# Altium PCB GEM_HV_channel.PcbDoc (part 3 of 3)
Units mm, origin at the board's own origin, x right, y up, seen from the top; angles counter-clockwise.
Board outline 124.5 x 38 mm, 4 copper layers (Top Layer, Layer 1, Layer 2, Bottom Layer), stack 1.441 mm thick; 166 components, 114 nets, 518 pads, 164 vias.
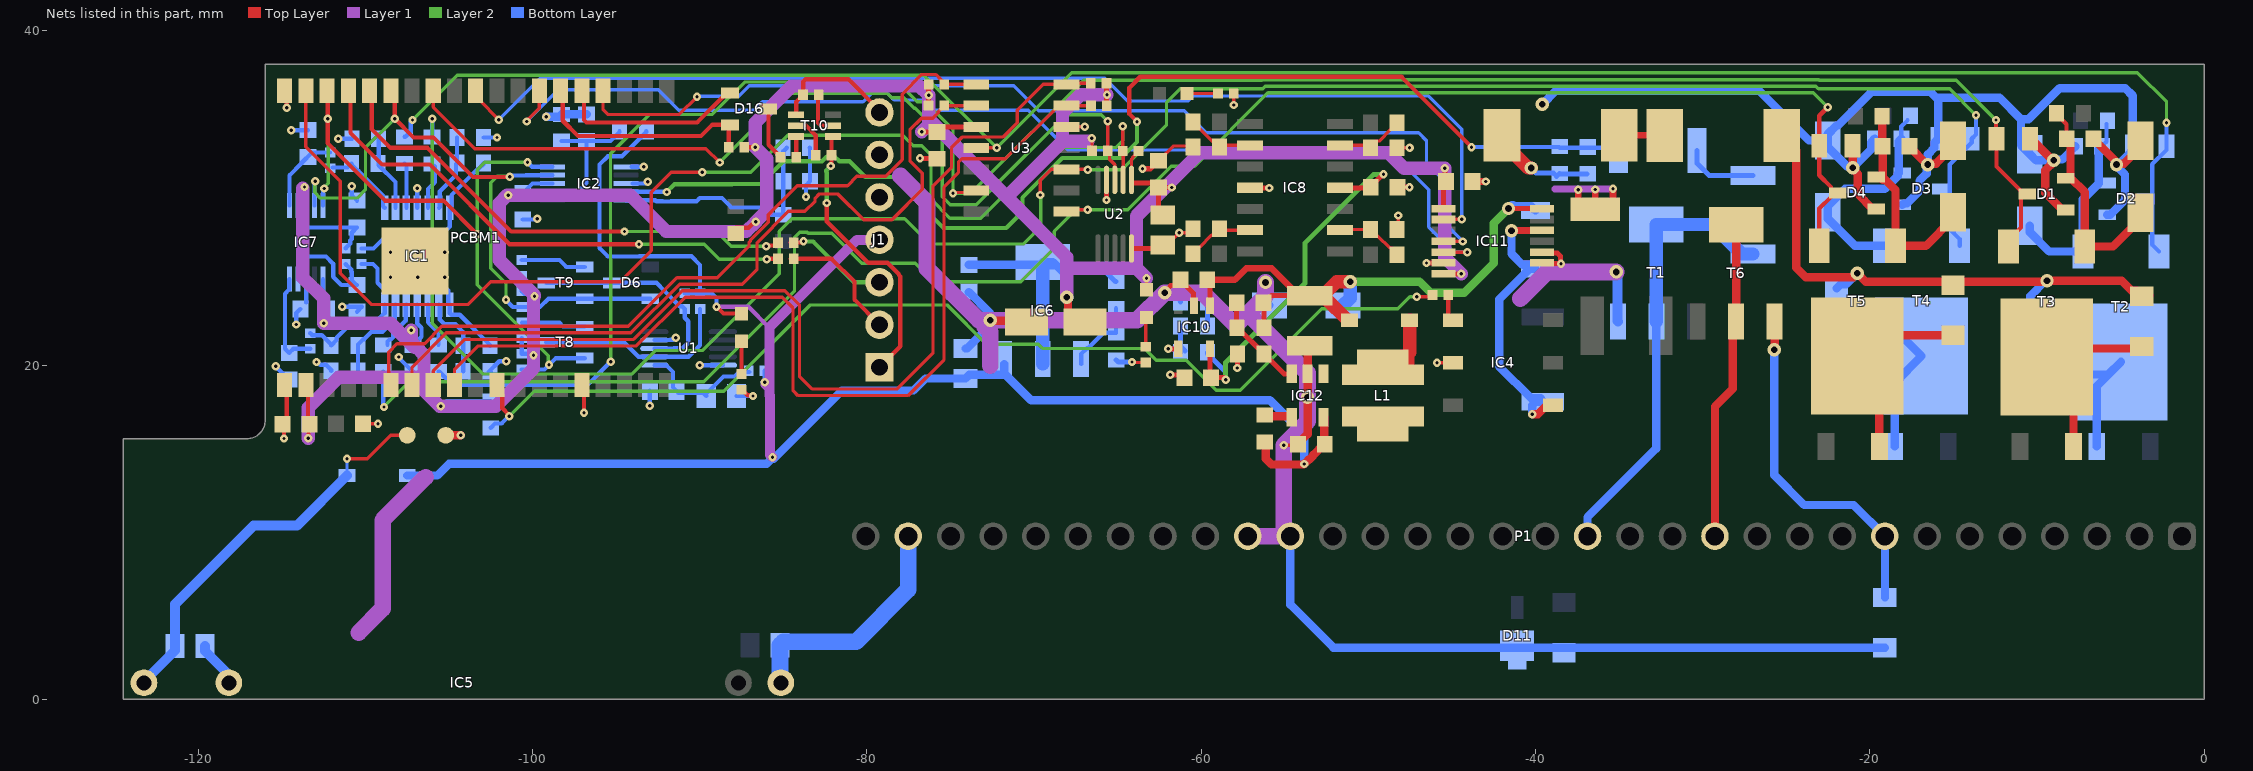
[diagram p4: the nets of this part, all layers, seen from the top]

## Via types
v1: diameter 0.5, hole 0.2, Top Layer to Bottom Layer, tented both sides, 139 vias
v2: diameter 0.8, hole 0.4, Top Layer to Bottom Layer, tented both sides, 19 vias
v3: diameter 0.5, hole 0.2, Top Layer to Bottom Layer, 6 vias

## Nets (pads, with @x,y where several pads share a name; then routed paths per layer and width w, separated by ;. In a path a pad name is that pad's centre, name@x,y a point inside that pad or via, vN(x,y) a via of type N, cw(c..) or ccw(c..) an arc to the next point about the centre after c; other vN are vias at no path point) (continued)
GND_HV: B3.1 C1.1 C2.1 C3.1 C4.1 C5.1 C7.1 C8.2 C9.1 C10.1 C11.1 C12.1 C13.1 C14.1 C16.1 C17.1 C18.1 C19.1 C20.1 C21.1 C22.1 C23.1 C24.1 C26.1 C27.1 C28.1 C29.1 C30.1 C39.1 C42.1 C48.1 C49.1 D1.1 D2.1 D3.1 D4.1 D5.2 D9.2 D10.2 D11.2 D12.2 D13.2 D14.2 D15.2 D26.2 IC1.11 IC2.1 IC2.3 IC4.2 IC5.14 IC7.3 IC8.11 IC10.2 IC11.6 IC11.9 IC11.10 IC12.2 J1.6 P1.22 P1.23 PCBM1.1 PCBM1.15 PCBM1.38 PCBM1.39 R2.1 R7.1 R8.1 R10.1 R14.1 R17.1 R18.1 R19.1 R20.1 R23.1 R24.1 R28.1 R31.1 R43.1 R44.1 R50.1 R52.1 R55.2 R60.1 R62.1 R66.1 T1.3 TP1.1 U1.4 U1.10 U2.4 U2.10 U3.12 | length 291.6
  Top Layer w0.2: C24.1@-110.157,16.5 v1(-109.25,16.5) ; U3.12@-68.06,34.259 v1(-66.962,34.259) ; v1(-64.145,20.188) -64.114,20.158 R44.1@-63.312,20.158 ; C21.1@-62.558,32.226 -61.677,33.107 -60.56,33.107 R52.1@-60.505,33.052 ; C22.1@-62.309,27.182 -62.059,27.182 v1(-61.323,27.919) -60.743,27.919 R60.1@-60.495,28.166 ; v1(-58.06,35.56) R55.2@-58.06,36.25 ; v1(-55.063,15.215) -54.273,15.215 C27.1@-54.212,15.276 ; R2.1@-48.301,28.148 -48.206,28.243 v1(-48.206,28.953) ; R14.1@-48.258,33.005 v1(-47.537,33.005) ; v1(-45.895,20.139) -44.486,20.139 IC4.2@-44.473,20.127
  Top Layer w0.254: v1(-114.87,15.612) -114.87,16.302 -114.709,16.463 PCBM1.1@-114.709,18.318 ; v1(-114.709,35.392) PCBM1.38@-114.709,36.418 ; v1(-96.929,17.147) PCBM1.15@-96.929,18.318 ; R43.1@-87.5,18.53 -87.48,18.53 -87.151,18.201 -86.859,18.201 v1(-86.812,18.154)
  Top Layer w0.3: v1(-76.821,32.387) -76.783,32.35 C23.1@-75.742,32.35 ; U2.4@-65.672,31.183 -65.664,31.175 v1(-65.664,29.88) ; U2.10@-64.172,26.983 -62.509,26.983 C22.1@-62.309,27.182 ; v1(-63.514,31.751) -63.033,31.751 C21.1@-62.558,32.226 ; v2(-62.192,24.331) -62.192,24.392 -61.824,24.76 -61.565,24.76 C20.1@-61.24,25.085 ; v1@-61.838,19.402 -61.163,19.402 C19.1@-61.011,19.251 ; C20.1@-61.24,25.11 C20.1@-61.24,25.085 ; IC10.2@-60.431,23.565 -60.467,23.601 -60.467,24.311 C20.1@-61.24,25.085 ; v1(-57.84,19.83) R66.1@-57.84,20.674 ; IC8.11@-57.062,30.588 v1@-55.952,30.588 ; C29.1@-48.261,30.65 v1(-47.54,30.65) ; v1@-46.525,26.112 v1(-46.523,26.115) IC11.6@-45.515,26.115 ; IC11.9@-39.615,26.115 -39.597,26.096 -38.496,26.096 -38.515,26.115 -38.515,26.527 -38.691,26.703 -39.554,26.703 IC11.10@-39.615,26.765
  Top Layer w0.4: C26.1@-43.768,30.984 v1(-42.977,30.984) ; TP1.1@-37.451,29.302 v1(-37.451,30.487) ; TP1.1@-36.432,29.323 v1(-36.432,30.507) ; TP1.1@-35.365,29.36 v1(-35.365,30.544)
  Top Layer w0.5: B3.1@-105.2,15.8 v1(-104.3,15.8) ; v2@-72.6,22.667 -70.546,22.667 C8.2@-70.457,22.578 ; IC8.11@-57.088,30.613 IC8.11@-57.062,30.588 ; C27.1@-54.212,15.276 -54.212,15.301 -53.637,15.877 IC12.2@-53.637,19.478 -53.637,21.028 C28.1@-53.508,21.156 ; R10.1@-21.03,33.138 -21.023,33.13 -21.023,31.82 v2(-21.016,31.813) -21.016,31.732 -20.724,31.44 -20.724,30.244 -19.831,29.351 D4.1@-19.631,29.351 ; C4.1@-17.638,33.092 -17.638,33.067 -16.571,32 v2(-16.546,32) -16.489,32.057 -16.036,32.057 -15.03,33.063 D15.2@-15.03,33.438 ; R8.1@-10.424,33.547 -10.362,33.547 v2@-9.223,32.408 ; v2(-9,32.25) -9,32.169 -9.5,31.669 -9.5,30.296 -8.484,29.281 D1.1@-8.284,29.281 ; C2.1@-6.624,33.547 -6.624,33.522 -5.307,32.206 -5.307,32.057 v2(-5.25,32) -5.193,32.057 -4.795,32.057 -3.812,33.04 D13.2@-3.812,33.415
  Top Layer w0.8: D26.2@-42,33.75 -42,33.353 -40.442,31.795 v2(-40.266,31.795)
  Layer 1 w0.4: -38.844,30.544 -36.432,30.544 v1(-35.365,30.544) v1@-35.41,30.5
  Layer 1 w1: -110.4,4 -108.97,5.43 -108.97,10.73 -106.4,13.3 ; -77.985,31.315 -76.4,29.73 -76.4,25.779 -73.311,22.689 -63.834,22.689 v2(-62.192,24.331) -59.902,24.331 -57.935,22.365 -57.2,23.1 ; -72.965,22.344 -72.621,22 -72.621,19.979 ; P1.23@-57.21,9.77 P1.22@-54.67,9.77 -55.063,10.163 v1(-55.063,15.215) -53.642,16.637 v2(-53.642,18.071) -53.642,19.542 -57.2,23.1 ; v2(-56.155,24.951) -56.155,24.145 -57.2,23.1 ; -40.91,23.99 -39.322,25.578 v2(-35.174,25.578)
  Bottom Layer w0.254: v1@-115.354,19.941 v1(-115.361,19.934) -115.361,19.906 -114.588,19.133 C11.1@-114.563,19.133 ; v1(-114.442,34.058) C12.1@-113.438,34.058 ; v1(-114.143,22.435) -114.143,23.119 C42.1@-113.896,23.366 ; C42.1@-113.54,23.747 IC7.3@-113.54,25.145 ; v1(-112.928,20.191) -112.861,20.191 -112.701,20.031 -112.371,20.031 -112.048,19.708 R18.1@-112.048,19.658 ; v1(-111.626,33.552) -110.824,33.552 R19.1@-110.811,33.538 ; v1(-111.381,23.5) -110.2,23.5 C10.1@-110.5,23.2 ; v1(-110.825,30.7) -110.825,30.167 C13.1@-110.5,29.842 ; v1(-108.016,20.489) -108,20.474 -108,20.436 -107.18,19.617 C16.1@-107.155,19.617 ; IC1.11@-106.901,29.413 v1(-106.901,30.577) ; R20.1@-102.924,33.625 -102.921,33.621 v1(-102.128,33.621) ; R17.1@-102.554,19.64 -102.502,19.588 -102.641,19.588 -101.994,20.235 v1(-101.581,20.235) ; C48.1@-100.587,28.71 -99.789,28.71 v1(-99.731,28.768) ; IC2.1@-94.065,31.864 v1(-93.352,31.864) v1@-93.4,31.816 ; IC2.3@-94.015,30.868 -93.279,30.868 -93.17,30.977 v1(-93.103,30.977) ; v1(-93,17.567) -92.989,17.578 C3.1@-92.989,18.485 ; U1.4@-92.715,21.5 -92.707,21.508 -91.756,21.508 -91.748,21.516 -91.566,21.516 v1(-91.443,21.639) ; v1(-90,20) U1.10@-88.615,20 ; C7.1@-87.807,18.154 v1(-86.812,18.154) ; v1@-83.642,30.081 -83.641,30.759 C14.1@-83.4,31 ; R50.1@-83.425,33 -83.399,32.974 C14.1@-83.399,31.001
  Bottom Layer w0.3: R24.1@-65.093,20.322 -64.96,20.188 v1(-64.145,20.188) ; v2(-62.192,24.331) -62.18,24.344 -61.755,24.344 -61.231,23.82 R62.1@-61.231,23.77 ; v2(-40.266,31.795) -39.971,31.5 -38.935,31.5 -38.735,31.3 R23.1@-38.56,31.475 -38.535,31.45 C18.1@-36.91,31.45
  Bottom Layer w0.5: v1(-99.188,34.855) -99.185,34.852 -98.421,34.852 R31.1@-98.27,35.004 C17.1@-96.77,35.004 ; C30.1@-74.1,21 -74.006,21 -72.621,22.385 v2(-72.621,22.688) -72.621,23.089 C9.1@-73.9,24.367 ; v2(-56.155,24.951) -56.155,23.67 -56.064,23.578 D9.2@-55.922,23.578 ; P1.22@-54.67,9.77 -54.67,5.67 -52.1,3.1 D10.2@-19.1,3.1 ; v2(-39.6,35.6) -38.8,36.4 -26.6,36.4 -23.639,33.439 D14.2@-22.522,33.439 ; v2@-21.328,31.871 -22.522,33.064 D14.2@-22.522,33.439 ; v2(-21.016,31.813) -19.934,32.895 -19.934,33.322 C5.1@-19.709,33.547 ; D3.1@-18.059,29.597 -17.984,29.672 -17.781,29.672 -17.029,30.424 -17.029,31.035 -16.604,31.461 -16.604,31.943 v2(-16.546,32) -16.535,32.011 -16.535,32.615 -16.134,33.017 -16.134,33.322 R28.1@-15.909,33.547 -15.909,35.841 -15.756,35.994 ; C1.1@-7.721,33.102 -7.721,33.077 -8.49,32.307 -8.943,32.307 v2(-9,32.25) -10.055,32.25 D12.2@-10.436,32.631 -10.961,33.156 -10.961,34.711 ; D2.1@-5.812,29.001 -5.612,29.001 -4.736,29.877 -4.736,31.404 -5.25,31.919 v2(-5.25,32) -5.132,32 -4.255,32.877 R7.1@-4.255,33.102 ; R7.1@-4.277,33.123 -4.277,36.119 -4.733,36.576 -8.643,36.576 -10.507,34.711 -10.961,34.711 ; D14.2@-22.522,33.439 -22.522,33.814 -21.997,34.339 -21.912,34.339 -19.897,36.355 -16.378,36.355 -16.017,35.994 -15.756,35.994 ; -15.756,35.994 -15.75,36 -12.25,36 -10.961,34.711
  Bottom Layer w0.6: C49.1@-119.6,3.2 -119.6,2.899 -118.17,1.469 IC5.14@-118.17,1 ; v2(-35.174,25.578) -35.103,25.507 -35.103,22.644 T1.3@-35.073,22.614
  other v1: -61.856,19.421 -38.477,26.077 -83.646,30.081 -55.937,30.599
  other v3: -108.5,25.25 -106.875,25.25 -105.25,25.25 -108.5,26.75 -106.875,26.75 -105.25,26.75
GPIO0/EMAC_CLKIN: D16.2 PCBM1.25 R30.1 | length 13.3
  Top Layer w0.254: PCBM1.25@-98.199,35.918 -98.199,34.625 -97.289,33.715 -89.923,33.715 -89.26,34.378 D16.2@-88.19,34.378 -88.272,34.296 R30.1@-88.272,33.042
GPIO2/HS2_DATA0: D16.1 PCBM1.24 | length 11.3
  Top Layer w0.254: PCBM1.24@-96.929,36.418 -96.929,34.66 -96.78,34.511 -90.157,34.511 -88.39,36.278 D16.1@-88.19,36.278
HV_LIM: D20.1 D21.1 D22.1 D23.1 D24.1 | length 33.4
  Top Layer w0.5: D24.1@-25.269,33.737 -24.398,32.866 -24.398,25.82 -23.846,25.268 -20.982,25.268 v2(-20.75,25.5) -20.25,25 -14.593,25 -9.458,25 v2(-9.404,25.054) -4.939,25.054 -4.332,24.447 -4.07,24.447 D21.1@-3.745,24.122 ; D21.1@-3.358,24.211 D21.1@-3.295,24.148
  Bottom Layer w0.5: D22.1@-21.993,24.598 -21.765,24.825 -21.425,24.825 v2(-20.75,25.5) ; -10.405,23.738 -10.405,24.138 -9.489,25.054 v2(-9.404,25.054)
HV_Meas: C18.2 IC2.4 R22.2 R23.2 | length 71.1
  Top Layer w0.254: v1(-63.843,34.568) -64.3,35.025 -64.3,36.6 -63.65,37.25 -48,37.25 -48,37.21 v1(-43.834,33.044)
  Layer 2 w0.254: v1(-91.983,30.363) -91.519,30.827 -88.06,30.827 -88.053,30.834 -86.366,30.834 -85,32.2 -82.684,32.2 -82.402,32.483 -81.932,32.483 -81.649,32.2 -81.05,32.2 -80.1,31.25 -77.75,31.25 -77,30.5 -77,29.791 -75.414,28.205 -71.666,28.205 -70.692,29.179 -70.692,30.02 -68.312,32.4 -64.8,32.4 -63.843,33.357 v1(-63.843,34.568)
  Bottom Layer w0.254: IC2.4@-94.408,30.368 -91.988,30.368 v1(-91.983,30.363) ; v1(-43.834,33.044) -38.604,33.044 -38.56,33 -35.194,33 R22.2@-35.037,32.844
HVQN_C: P1.15 R21.1 T1.2 T1.4 | length 26.8
  Bottom Layer w0.5: P1.15@-36.89,9.77 -36.89,10.91 -32.79,15.01 T1.2@-32.79,22.597
  Bottom Layer w0.8: T1.2@-32.773,22.614 T1.4@-32.773,28.414 -29.427,28.414 -27.663,26.65 R21.1@-27,26.65
HVQP_C: P1.12 T6.2 T6.4 | length 19.2
  Top Layer w0.5: P1.12@-29.27,9.77 -29.27,17.53 -28.2,18.6 -28.2,22.4 T6.2@-28,22.6 T6.4@-28,28.4
HVQP_E: D10.1 P1.8 T6.3 | length 21.1
  Top Layer w0.5: T6.3@-25.85,22.45 T6.3@-25.7,22.6 v2@-25.7,21
  Bottom Layer w0.5: v2(-25.716,20.922) -25.716,13.416 -23.936,11.636 -20.976,11.636 P1.8@-19.11,9.77 -19.1,9.76 D10.1@-19.1,6.1
HVSET0: PCBM1.11 R27.2 R68.1 | length 65.5
  Top Layer w0.2: v1(-47.1,24.1) -46.27,24.1 R68.1@-46.17,24.2
  Top Layer w0.254: PCBM1.11@-102.009,18.318 -101.909,18.318 -101.811,18.22 -101.811,17.423 -101.407,17.018 v1(-101.407,16.952)
  Layer 2 w0.2: v1(-101.407,16.952) -99.911,18.447 -88.553,18.447 -83.4,23.6 -75.2,23.6 -72.85,21.25 -69.75,21.25 -69.5,21 -63.4,21 -62.701,20.301 -60.901,20.301 -59.1,18.5 -57.67,18.5 -52.791,23.379 -48.236,23.379 -47.515,24.1 v1(-47.1,24.1)
  Bottom Layer w0.254: R27.2@-102.5,16.25 -102.243,16.507 -101.851,16.507 v1(-101.407,16.952)
I2C1_SCL: IC2.10 IC7.10 PCBM1.36 R12.1 T8.2 | length 41.5
  Top Layer w0.254: PCBM1.36@-112.169,35.918 -112.25,35.837 v1(-112.25,34.75) -112.25,33.269 -108.824,29.843 -105.333,29.843 v1(-103.32,27.829)
  Layer 2 w0.2: v1(-112.464,30.566) -112.464,30.633 -112.216,30.88 -112.216,34.716 v1(-112.25,34.75) ; v1(-100.303,32.137) -102.863,32.137 -103.32,31.68 v1(-103.32,27.829) -103.32,24.82 -99.062,20.562 -99.062,20.062 v1(-99.015,20.015)
  Bottom Layer w0.254: IC7.10@-112.54,29.545 -112.54,30.489 v1(-112.464,30.566) ; R12.1@-100.665,19.738 R12.1@-100.645,19.738 -99.293,19.738 v1(-99.015,20.015) -98.61,20.42 T8.2@-96.887,20.42 ; v1(-100.303,32.137) -100.033,31.868 IC2.10@-98.808,31.868
I2C1_SDA: D6.2 IC2.9 IC7.9 PCBM1.33 R13.1 T9.2 | length 40.4
  Top Layer w0.254: PCBM1.33@-108.359,35.918 -108.25,35.809 v1(-108.25,34.75) -107.122,33.622 -105.935,33.622 -103.57,31.257 -101.369,31.257 v1(-101.361,31.265)
  Layer 2 w0.2: v1(-113,31) -113.031,30.969 -113.031,30.331 -112.698,29.999 -110.501,29.999 -110,30.5 -110,33 v1(-108.25,34.75) ; v1(-101.592,23.908) -101.592,24.898 -102.5,25.806 -102.5,30.909 -102.112,31.297 -101.393,31.297 v1(-101.361,31.265)
  Bottom Layer w0.254: IC7.9@-113.04,29.545 -113.04,30.96 v1(-113,31) ; v1@-101.628,23.926 -101.187,23.485 -100.651,23.485 R13.1@-100.645,23.479 -99.551,23.479 -99.054,23.976 T9.2@-96.887,23.976 D6.2@-92.954,23.976 ; v1(-101.361,31.265) -101.283,31.344 -100.421,31.344 -100.396,31.368 IC2.9@-98.808,31.368
I2C2_SCL: PCBM1.37 R53.1 U2.2 | length 75.1
  Top Layer w0.2: PCBM1.37@-113.564,36.418 -113.564,33.064 -111.5,31 -111.5,25.5 -109.626,23.626 -103.874,23.626 -102.5,25 -94.753,25 -92.895,26.859 -92.895,30.355 -91.7,31.55 v1(-89.847,31.55) ; v1(-64.7,34.3) -64.7,32.839 -64.672,32.811 U2.2@-64.672,31.183
  Layer 2 w0.2: v1(-89.847,31.55) -86.95,31.55 -84.75,33.75 -77.853,33.75 -77.22,33.117 -76.722,33.117 -76.165,32.56 -76.165,29.915 -75.034,28.784 -73.195,28.784 -68.961,33.018 -65.107,33.018 -64.7,33.425 v1(-64.7,34.3)
I2C2_SDA: PCBM1.31 R54.1 U2.3 | length 55.3
  Top Layer w0.2: PCBM1.31@-105.944,36.418 -105.944,35.444 -103.453,32.953 -89.637,32.953 v1(-88.811,32.127) ; v1(-65.6,34.6) -65.597,34.597 R54.1@-65.597,32.826 -65.488,32.717 -65.488,32.321 -65.172,32.005 U2.3@-65.172,31.183
  Layer 2 w0.2: v1(-88.811,32.127) -84.689,36.25 -79.732,36.25 -79.722,36.26 -78.778,36.26 -78.518,36 -77.802,36 -77.162,35.36 -77.11,35.36 -75.486,33.736 -75.486,30.071 -75.009,29.595 -73.461,29.595 -72.292,30.764 -72.292,30.779 -68.085,34.985 -65.985,34.985 v1(-65.6,34.6)
I_Meas0: IC1.8 R47.1 R92.2 | length 4.7
  Bottom Layer w0.254: R47.1@-111.962,31.829 -111.068,31.829 R92.2@-110.835,32.061 ; R92.2@-110.811,32.014 -110.811,31.964 -110.488,31.641 -110.438,31.641 -108.949,30.153 -108.949,29.511 IC1.8@-108.851,29.413
I_Meas1: IC1.1 R16.2 R45.1 | length 11
  Bottom Layer w0.254: R45.1@-110.24,26.052 -109.552,26.052 -109.276,25.776 -109.276,24.931 -109.01,24.665 ; -109,24.655 -109.01,24.665 ; R16.2@-102.554,21.164 -102.554,21.214 -104.354,23.015 -104.853,23.015 -104.951,23.113 IC1.1@-104.951,23.613 -105.049,23.711 -105.049,24.473 -105.241,24.665 -109.01,24.665
I_Meas2: IC1.14 R48.1 R93.2 | length 10.5
  Bottom Layer w0.254: R48.1@-110.242,26.985 -109.515,26.985 -108.5,28 -105.25,28 -104.951,28.299 IC1.14@-104.951,29.413 -104.853,29.511 -104.853,30.171 -103.297,31.728 -103.247,31.728 -102.924,32.051 R93.2@-102.924,32.101
I_Meas3: IC1.7 R46.1 R91.2 | length 6.2
  Bottom Layer w0.254: R46.1@-113.302,21.916 -113.181,21.795 -112.611,21.795 -112.048,21.232 R91.2@-112.048,21.182 -111.725,21.505 -111.725,21.641 -111.081,22.285 -109.973,22.285 -109.758,22.5 -109.464,22.5 -108.851,23.113 IC1.7@-108.851,23.613
I_Meas_sens0: D2.3 R7.2 R109.1 T2.2 U3.4 | length 122.4
  Top Layer w0.2: U3.4@-73.46,32.989 -73.449,33 v1(-72.239,33)
  Layer 2 w0.2: v1(-107.182,34.669) -104.502,37.349 -76.588,37.349 v1(-72.239,33) -67.739,37.5 -62.621,37.5 -4,37.5 -2.255,35.755 v1(-2.255,34.495)
  Bottom Layer w0.254: R109.1@-107.663,33.663 -107.613,33.663 -107.29,33.986 -107.29,34.561 v1(-107.182,34.669) ; T2.2@-2.7,26.797 -3.115,27.211 -3.115,32.017 -2.255,32.877 R7.2@-2.255,33.102 v1(-2.255,34.495)
I_Meas_sens1: D1.3 R8.2 R107.1 T3.2 U3.6 | length 127.4
  Top Layer w0.2: v1(-74.854,30.288) -74.817,30.325 -73.584,30.325 U3.6@-73.46,30.449
  Top Layer w0.254: v1(-12.455,34.665) -12.455,33.579 R8.2@-12.424,33.547 -12.424,31.886 -10.982,30.444 -10.982,30.429 D1.3@-10.784,30.231 ; T3.2@-11.704,27.097 -11.704,27.497 -10.967,28.234 -10.967,30.048 D1.3@-10.784,30.231 ; D1.3@-10.584,30.231 D1.3@-10.784,30.231
  Layer 2 w0.2: v1(-95.331,20.201) -95.331,26.306 -95.34,26.315 -95.34,32.66 -93,35 -89.25,35 -87.312,36.938 -78.188,36.938 -77,35.75 -76.667,35.75 -76.53,35.613 -76.363,35.613 -74.854,34.104 v1(-74.854,30.288) -73.79,30.288 -67.039,37.04 -56.363,37.04 -56.333,37.07 -55.32,37.07 -23.065,37.07 -23.035,37.04 -14.831,37.04 v1(-12.455,34.665)
  Bottom Layer w0.254: R107.1@-105.631,19.617 -105.581,19.617 -104.777,18.813 -96.719,18.813 v1(-95.331,20.201)
I_Meas_sens2: D3.3 R28.2 R110.1 T4.2 U3.10 | length 128.7
  Top Layer w0.2: v1(-69.625,30.182) -69.625,31.075 -68.981,31.719 U3.10@-68.06,31.719 -66.815,31.719 v1(-66.789,31.694)
  Layer 2 w0.2: v1(-106.008,34.736) -106.008,22.5 -102.984,19.475 -94.025,19.475 -92.619,20.881 -89.829,20.881 -85.25,25.46 -85.25,28 -84.5,28.75 -77.75,28.75 -76.25,27.25 -70.629,27.25 -69.6,28.279 -69.6,30.157 v1(-69.625,30.182) ; v1(-66.789,31.694) -64.749,31.694 -62.074,34.369 -62.074,35.726 -61.27,36.53 -56.322,36.53 -56.172,36.68 -55.159,36.68 -23.227,36.68 -23.077,36.53 -15.232,36.53 v1(-13.653,34.951)
  Bottom Layer w0.254: R110.1@-106.014,33.644 -106.008,33.65 v1(-106.008,34.736) ; T4.2@-14.629,27.147 -14.629,27.547 -15.221,28.139 -15.221,32.01 -13.909,33.322 R28.2@-13.909,33.547 -13.653,33.803 v1(-13.653,34.951)
I_Meas_sens3: D4.3 R10.2 R108.1 T5.2 U3.8 | length 112.3
  Top Layer w0.2: U3.8@-68.06,29.179 -67.939,29.3 v1(-66.8,29.3)
  Top Layer w0.254: T5.2@-23.03,27.138 -23.03,29.369 -22.329,30.071 -22.329,30.103 D4.3@-22.131,30.301 ; v1(-22.524,35.426) -23.03,34.92 R10.2@-23.03,33.138 -23.03,31.364 -22.329,30.662 -22.329,30.499 D4.3@-22.131,30.301 ; D4.3@-21.931,30.301 D4.3@-22.131,30.301
  Layer 2 w0.2: v1(-108.893,17.499) -107.392,19 -89.767,19 -84.334,24.432 -84.334,27.627 -84.018,27.944 -83.571,27.944 -83.527,27.9 -82.1,27.9 -80.3,26.1 -77.1,26.1 -76,25 -70.8,25 -68.8,27 -68.8,28 -67.5,29.3 v1(-66.8,29.3) -64.4,29.3 -61.8,31.9 -60.4,31.9 -56.01,36.29 -54.997,36.29 -23.389,36.29 v1(-22.524,35.426)
  Bottom Layer w0.254: R108.1@-108.929,19.617 -108.929,17.535 v1(-108.893,17.499)
NetB2_1: B2.1 C49.2 D17.2 IC5.16 | length 24.1
  Top Layer w0.2: v1(-111.1,14.4) -109.9,14.4 -108.5,15.8 B2.1@-107.5,15.8
  Bottom Layer w0.2: D17.2@-111.1,13.4 v1(-111.1,14.4)
  Bottom Layer w0.6: IC5.16@-123.25,1 -123.25,1.074 -121.4,2.924 C49.2@-121.4,3.2 -121.4,5.7 -116.7,10.4 -114.1,10.4 D17.2@-111.1,13.4
NetC1_2: C1.2 D2.2 D12.1 R15.1 T2.1 | length 12.2
  Bottom Layer w0.254: C1.2@-6.121,33.102 -5.852,33.37 R15.1@-5.852,34.422
  Bottom Layer w0.5: D12.1@-10.436,28.331 -10.436,27.956 -9.277,26.797 T2.1@-7.26,26.797 -7.26,29.919 -6.308,30.871 -6.308,32.914 C1.2@-6.121,33.102
NetC2_2: C2.2 D1.2 D13.1 R9.1 T3.1 | length 12.8
  Top Layer w0.254: R9.1@-8.7,34.872 -8.242,34.414 -8.242,33.565 C2.2@-8.224,33.547
  Top Layer w0.5: C2.2@-8.224,33.547 -7.999,33.322 -7.999,31.206 -7.144,30.351 T3.1@-7.144,27.097 -5.455,27.097 -3.812,28.74 D13.1@-3.812,29.115
NetC3_2: C3.2 C7.2 R73.2 U1.1 | length 7.5
  Bottom Layer w0.254: U1.1@-92.715,20 -92.015,20 -91.603,19.588 -91.603,18.674 -91.281,18.353 -89.806,18.353 -89.682,18.229 C7.2@-89.607,18.154 ; C7.2@-89.607,18.304 -88.587,19.324 -87.916,19.324 -87.647,19.593 R73.2@-87.034,19.593
NetC4_2: C4.2 D4.2 D15.1 R11.1 T5.1 | length 12.9
  Top Layer w0.5: D4.2@-19.631,31.251 -19.233,31.251 -18.47,30.489 T5.1@-18.47,27.138 -16.655,27.138 -15.03,28.763 D15.1@-15.03,29.138 ; R11.1@-19.25,34.673 -19.25,33.104 C4.2@-19.238,33.092 D4.2@-19.238,31.097
NetC5_2: C5.2 D3.2 D14.1 R29.1 T4.1 | length 13.3
  Bottom Layer w0.254: C5.2@-18.109,33.547 -18.122,33.56 -18.122,34.28 R29.1@-17.757,34.645
  Bottom Layer w0.5: T4.1@-19.189,27.147 -20.905,27.147 -22.522,28.764 D14.1@-22.522,29.139 -22.522,29.514 -21.49,30.547 -19.104,30.547 -18.334,31.316 -18.334,31.441 -18.279,31.497 -18.279,33.377 C5.2@-18.109,33.547
NetC10_2: C10.2 IC7.4 R45.2 | length 7.3
  Bottom Layer w0.254: IC7.4@-114.04,25.145 -114.017,25.168 -114.017,26.017 -113.534,26.5 -112.365,26.5 -111.926,26.061 -111.926,25.282 -111.444,24.8 C10.2@-110.525,24.8 ; R45.2@-111.18,26.052 -111.18,26.032 -111.017,25.869 -110.997,25.869 -110.847,25.719 -110.847,25.611 -110.825,25.588 -110.825,25.1 C10.2@-110.525,24.8 ; C10.2@-110.5,24.8 C10.2@-110.525,24.8
NetC11_2: C11.2 IC7.5 R46.2 | length 6
  Bottom Layer w0.254: IC7.5@-114.54,25.145 -114.563,25.122 -114.563,24.522 -114.816,24.27 -114.816,20.985 C11.2@-114.563,20.733 -114.32,20.976 R46.2@-113.302,20.976
NetC12_2: C12.2 IC7.6 R47.2 | length 4.8
  Bottom Layer w0.254: IC7.6@-114.54,29.545 -114.54,31.356 -113.811,32.085 -113.811,32.11 -113.2,32.721 R47.2@-112.13,32.721
NetC13_2: C13.2 IC7.7 R48.2 | length 6.2
  Bottom Layer w0.254: IC7.7@-114.04,29.545 -114.04,28.54 -113.742,28.242 -110.525,28.242 C13.2@-110.5,28.242 -110.817,27.925 -110.817,27.554 -110.908,27.463 -110.908,27.28 -111.182,27.005 R48.2@-111.182,26.985
NetC14_2: C14.2 IC2.5 R49.2 R50.2 | length 14
  Bottom Layer w0.254: IC2.5@-94.408,29.868 -92.67,29.868 -92.603,29.801 -92.223,29.801 -92.218,29.796 -91.748,29.796 -91.743,29.801 -90.199,29.801 -90,30 -88.676,30 -88.109,29.433 -86.314,29.433 -85.881,29 R49.2@-85,29 C14.2@-85,31 -85,32.8 R50.2@-84.8,33
NetC17_2: C17.2 IC2.7 R31.2 R32.2 | length 8.5
  Bottom Layer w0.254: IC2.7@-98.808,30.368 -97.303,30.368 -96.77,30.901 C17.2@-96.77,33.404 ; R31.2@-98.27,33.404 C17.2@-96.77,33.404 ; R32.2@-94.8,34 -94.8,33.95 -95.346,33.404 C17.2@-96.77,33.404
NetC25_1: C25.1 IC12.3 R64.1 R66.2 | length 6
  Top Layer w0.3: C25.1@-57.879,23.737 -57.879,22.262 R64.1@-57.854,22.237 -57.854,22.187 -57.554,21.887 -57.471,21.887 -56.608,21.024 -56.54,21.024 -56.24,20.724 R66.2@-56.24,20.674 -55.045,19.478 IC12.3@-54.587,19.478
NetD8_2: D8.2 IC12.1 L1.2 | length 4.4
  Top Layer w0.8: L1.2@-49.137,20.478 L1.2@-47.987,20.528 ; L1.2@-47.855,20.459 -47.537,20.778 D8.2@-47.537,22.678 ; L1.2@-47.645,19.498 -47.645,20.404 L1.2@-47.629,20.404
NetD16_3: D16.3 R38.2 | length 3.2
  Top Layer w0.254: D16.3@-85.89,35.328 -85.89,33.186 -85.172,32.468 R38.2@-85.172,32.448
NetD20_2: D20.2 R101.1 T2.3 | length 10.3
  Bottom Layer w0.5: -10.405,19.438 T2.3@-5.739,19.438 ; R101.1@-6.425,15.138 -6.425,18.752 T2.3@-5.739,19.438 ; T2.3@-4.98,20.197 T2.3@-5.739,19.438
NetD21_2: D21.2 R102.1 T3.3 | length 12.2
  Top Layer w0.5: R102.1@-7.824,15.138 -7.824,18.897 -9.399,20.472 T3.3@-9.424,20.497 -8.921,21 D21.2@-3.495,21
NetD22_2: D22.2 R103.1 T4.3 | length 11.8
  Bottom Layer w0.5: D22.2@-22.244,21.546 -17.908,21.546 T4.3@-16.909,20.547 -18.509,18.947 R103.1@-18.509,15.138
NetD23_2: D23.2 R104.1 T5.3 | length 12.2
  Top Layer w0.5: R104.1@-19.43,15.138 -19.43,19.218 T5.3@-20.75,20.538 -19.492,21.796 D23.2@-15.038,21.796
NetD24_2: D24.2 D26.1 | length 2.7
  Top Layer w0.254: D24.2@-32.282,33.75 D24.2@-32.269,33.737
  Top Layer w0.4: D26.1@-35,33.75 D24.2@-32.282,33.75
NetIC1_2: IC1.2 R16.1 R17.2 | length 5
  Bottom Layer w0.254: IC1.2@-105.601,23.613 -105.557,23.569 -105.557,22.73 -105.276,22.449 -104.615,22.449 -104.154,21.987 R16.1@-104.154,21.164 R17.2@-104.154,19.64
NetIC1_3: IC1.3 R107.2 | length 2.7
  Bottom Layer w0.254: IC1.3@-106.251,23.613 -106.251,22.561 -105.631,21.941 R107.2@-105.631,21.217
NetIC1_5: IC1.5 R108.2 | length 2.9
  Bottom Layer w0.254: R108.2@-108.679,21.217 -108.679,21.417 -108.556,21.54 -108.479,21.54 -108.33,21.688 -108.33,21.926 -107.595,22.661 -107.595,23.569 IC1.5@-107.551,23.613
NetIC1_6: IC1.6 R18.2 R91.1 | length 5.3
  Bottom Layer w0.254: R18.2@-110.448,19.658 -110.448,21.232 -110.125,21.555 -110.075,21.555 -109.63,22 -108.975,22 -108.468,22.507 -108.245,22.73 -108.245,23.569 IC1.6@-108.201,23.613
NetIC1_9: IC1.9 R19.2 R92.1 | length 4.5
  Bottom Layer w0.254: R19.2@-109.211,33.538 -109.211,32.014 -109.211,31.964 -108.201,30.955 IC1.9@-108.201,29.413
NetIC1_10: IC1.10 R109.2 | length 2.7
  Bottom Layer w0.254: R109.2@-107.663,32.063 -107.551,31.951 IC1.10@-107.551,29.413
NetIC1_12: IC1.12 R110.2 | length 2.9
  Bottom Layer w0.254: IC1.12@-106.251,29.413 -106.251,30.535 -105.848,30.938 -105.848,31.878 R110.2@-106.014,32.044
NetIC1_13: IC1.13 R20.2 R93.1 | length 4.7
  Bottom Layer w0.254: IC1.13@-105.601,29.413 -105.557,29.457 -105.557,30.397 -104.585,31.368 -104.585,32.039 R93.1@-104.524,32.101 R20.2@-104.524,33.625
NetIC4_1: IC4.1 R68.2 | length 1.6
  Top Layer w0.254: R68.2@-45.23,24.2 -45.23,22.976 IC4.1@-44.947,22.693
NetIC6_1: IC6.1 R24.2 R25.1 | length 4.7
  Bottom Layer w0.254: IC6.1@-67.185,20.068 -67.185,20.668 -66.837,21.016 -66.782,21.016 -65.854,21.943 -65.114,21.943 R24.2@-65.093,21.922 R25.1@-65.093,23.4
NetIC8_2: IC8.2 R1.1 R2.2 | length 4.1
  Top Layer w0.2: IC8.2@-51.688,28.073 -51.648,28.113 R2.2@-49.886,28.113 -49.886,28.063 -49.536,27.713 -49.437,27.713 -48.737,27.013 -48.636,27.013 -48.286,26.663 R1.1@-48.286,26.613
NetIC8_6: IC8.6 R6.1 R14.2 | length 4.1
  Top Layer w0.2: IC8.6@-51.688,33.153 -50.029,33.153 R14.2@-49.886,33.01 -49.886,33.06 -49.536,33.41 -49.353,33.41 -48.653,34.11 -48.636,34.11 -48.286,34.46 R6.1@-48.286,34.51
NetIC8_9: IC8.9 R26.1 R52.2 | length 3.6
  Top Layer w0.2: R26.1@-60.137,34.202 -59.337,33.402 -59.205,33.402 -58.905,33.102 R52.2@-58.905,33.052 -58.804,33.153 IC8.9@-57.088,33.153
NetIC8_13: IC8.13 R51.1 R60.2 | length 2.8
  Top Layer w0.2: R51.1@-60.09,27.066 -59.39,27.766 R60.2@-59.245,27.766 ; R60.2@-58.802,28.073 IC8.13@-57.088,28.073
NetIC10_4: IC10.4 R61.1 R63.2 | length 3
  Top Layer w0.3: v1(-61.975,20.975) IC10.4@-61.383,20.975
  Bottom Layer w0.3: v1(-61.975,20.975) -61.435,20.975 R61.1@-61.231,20.77 ; R63.2@-61.229,22.346 -61.229,21.12 R61.1@-60.965,20.856
NetIC12_4: IC12.4 R65.1 | length 1.7
  Top Layer w0.5: R65.1@-56.201,17.008 -56.143,16.95 -54.637,16.95 -54.587,16.9 IC12.4@-54.587,16.878
NetLD1_1: LD1.1 R43.2 | length 2.2
  Top Layer w0.254: R43.2@-87.5,19.47 LD1.1@-87.5,21.675
NetLD2_1: LD2.1 R44.2 | length 1.7
  Top Layer w0.2: R44.2@-63.312,21.098 LD2.1@-63.312,22.818
NetLD3_1: LD3.1 R55.1 | length 1.8
  Top Layer w0.2: LD3.1@-60.85,36.25 R55.1@-59,36.25
NetR21_2: R21.2 R22.1 | length 4.4
  Bottom Layer w0.3: R22.1@-30.337,32.844 -30.337,32.073 -29.614,31.35 R21.2@-27,31.35
NetR34_2: R34.2 T10.2 | length 2.6
  Top Layer w0.254: T10.2@-84.234,34.331 -83.642,34.331 -83.058,33.747 R34.2@-83.058,32.553
NetR35_2: R35.2 T10.5 | length 2.7
  Top Layer w0.254: R35.2@-82.924,36.187 -82.924,34.48 -82.775,34.331 T10.5@-82.034,34.331
NetR38_1: R38.1 T10.3 | length 1.2
  Top Layer w0.254: T10.3@-84.283,33.632 -84.256,33.632 -84.232,33.608 R38.1@-84.232,32.448
NetR40_1: R40.1 T8.1 | length 3.8
  Bottom Layer w0.254: R40.1@-100.635,22.539 -98.393,22.539 -98.175,22.32 T8.1@-96.887,22.32
NetR42_1: R42.1 T9.1 | length 3.9
  Bottom Layer w0.254: R42.1@-100.645,26.29 -98.395,26.29 -97.981,25.876 T9.1@-96.887,25.876
NetR62_2: R62.2 R63.1 | length 1.4
  Bottom Layer w0.3: R62.2@-59.631,23.77 -59.631,22.348 R63.1@-59.629,22.346
OC_0: PCBM1.7 R36.1 U3.2 | length 46.9
  Top Layer w0.2: PCBM1.7@-107.214,18.818 -107.214,19.886 -105.17,21.93 -94.122,21.93 -91.204,24.847 -87.453,24.847 -86.574,25.726 -86.574,27.226 -86.572,27.228 -86.572,27.332 -84.704,29.2 -83.716,29.2 -83.106,29.81 -83.106,29.994 -82.86,30.24 -81.74,30.24 -80.2,28.7 -78.5,28.7 -76.681,30.519 -76.681,31.484 -77.425,32.228 -77.425,34.087 -76.735,34.776 -76.069,34.776 -75.741,35.104 -75.741,35.174 R36.1@-75.381,35.534 -75.376,35.529 U3.2@-73.46,35.529
  Top Layer w0.3: U3.2@-73.514,35.584 U3.2@-73.46,35.529
OC_1: PCBM1.6 R37.1 U3.1 | length 47.1
  Top Layer w0.2: PCBM1.6@-108.484,18.818 -108.614,18.948 -108.614,20.786 -108.115,21.285 -106.465,21.285 -105.43,22.32 -94.283,22.32 -91.366,25.237 -88.945,25.237 -87.05,27.132 -87.05,27.35 -86.962,27.438 -86.962,27.493 -85.9,28.556 -85.9,29 -84.159,30.741 -81.159,30.741 -80.6,31.3 -78.888,31.3 -77.888,32.3 -77.888,36.219 -76.717,37.39 -75.896,37.39 -75.509,37.002 -75.509,36.932 R37.1@-75.367,36.79 -75.357,36.799 U3.1@-73.46,36.799
OC_2: PCBM1.9 R56.1 U3.13 | length 59.7
  Top Layer w0.2: PCBM1.9@-104.674,18.818 -104.674,19.726 -103.25,21.15 -93.799,21.15 -90.881,24.067 -85.067,24.067 -84.42,23.42 -84.42,18.478 -84.127,18.185 -77.54,18.185 -75.388,20.337 -75.388,30.059 -75.394,30.065 -75.394,30.512 -75.388,30.518 -75.388,30.661 -74.525,31.524 -74.525,32.14 -74.315,32.349 -71.717,32.349 -68.537,35.529 U3.13@-68.06,35.529 -66.604,35.529 R56.1@-66.589,35.515
OC_3: PCBM1.8 R57.1 U3.14 | length 61.7
  Top Layer w0.2: PCBM1.8@-105.944,18.818 -105.944,19.656 -104.06,21.54 -93.96,21.54 -91.043,24.457 -84.906,24.457 -84.03,23.582 -84.03,19.316 -83.289,18.575 -78.172,18.575 -76.048,20.7 -76.048,30.704 -74.942,31.81 -74.942,32.993 -74.285,33.65 -71.85,33.65 -71,34.5 -71,35.25 -69.451,36.799 U3.14@-68.06,36.799 -67.986,36.873 R57.1@-66.603,36.873
P3V3_HV: C8.1 C9.2 C16.2 C21.2 C22.2 C23.2 C26.2 C39.2 C42.2 C48.2 IC1.4 IC2.8 IC6.2 IC6.4 IC7.1 IC7.8 IC11.1 IC11.7 LD2.2 PCBM1.2 R4.1 R12.2 R13.2 R25.2 R27.1 R30.2 R36.2 R37.2 R40.2 R42.2 R53.2 R54.2 R56.2 R57.2 U2.1 U3.3 | length 203.2
  Top Layer w0.2: v1(-66.543,33.57) -66.537,33.564 R54.2@-66.537,32.826 ; U2.1@-64.172,31.183 -64.172,32.317 -64.109,32.381 -64.109,32.451 R53.2@-63.749,32.811 ; LD2.2@-63.276,24.505 -63.276,25.198 v1(-63.274,25.199)
  Top Layer w0.254: PCBM1.2@-113.439,18.318 -113.439,16.463 -113.413,16.438 v1(-113.413,15.633) v1@-113.386,15.605 ; R4.1@-87.84,28.219 -87.082,28.219 -86.72,28.58 v1(-86.653,28.58) ; R30.2@-87.332,33.042 -87.326,33.036 -86.696,33.036 v1(-86.691,33.03)
  Top Layer w0.3: v1(-76.714,33.959) -76.705,33.95 C23.2@-75.742,33.95 ; R36.2@-76.321,35.534 -76.314,35.542 -76.314,36.783 R37.2@-76.307,36.79 ; C23.2@-75.635,33.956 -75.331,34.259 U3.3@-73.46,34.259 ; R57.2@-65.663,36.873 -65.656,36.866 -65.656,35.522 R56.2@-65.649,35.515 ; U2.1@-64.172,31.183 U2.1@-64.172,31.083 -64.172,30.895 -62.827,30.895 C21.2@-62.558,30.626 ; C22.2@-62.309,28.982 -62.558,29.231 C21.2@-62.558,30.626 ; v1(-61.767,30.626) C21.2@-62.558,30.626 ; IC11.7@-45.515,25.465 -45.514,25.466 -44.447,25.466 v1(-44.446,25.467) ; IC11.1@-45.515,29.365 -45.515,30.984 -45.428,31.072 v1(-45.428,31.772)
  Top Layer w0.5: v2(-68.043,24.073) -67.968,23.998 -67.968,23.053 -67.493,22.578 C8.1@-67.207,22.578
  Layer 1 w0.8: v1@-113.741,30.588 -113.741,25.241 -112.5,24 v1(-112.5,22.5) -108.5,22.5 -107.067,21.067 -106.933,21.067 ; v1(-113.413,15.633) -113.413,17.447 -111.592,19.268 -106.5,19.268 ; v1(-107.268,22.097) -107.268,21.402 -106.933,21.067 ; v1(-99.885,24.128) -99.943,24.07 v1(-99.943,20.588) -99.943,19.807 -102.2,17.55 v1(-105.503,17.55) -105.55,17.55 -106.5,18.5 -106.5,19.268 ; v1@-99.885,24.174 -102,26.289 -102,29.692 -101.531,30.161 v1(-101.449,30.161) -94.161,30.161 -92,28 -87.208,28 v1@-86.653,28.555 ; v1(-86.653,28.58) -86,29.234 -86,32.34 v1(-86.691,33.03) -86.691,34.509 -84.5,36.7 -76.853,36.7 v1(-76.306,36.153) -76.306,34.367 v1(-76.714,33.959) ; -76.306,34.725 -71.64,30.06 ; v2(-68.043,24.073) -68.043,25.8 ; -66.8,33.4 -68.3,33.4 ; v1(-65.641,36.178) -67.222,36.178 -68.3,35.1 -68.3,33.4 ; v1(-63.274,25.199) -63.875,25.8 ; v1(-44.446,25.467) -45.428,26.449 v1(-45.428,31.772) -47.872,31.772 -48.8,32.7 -60.1,32.7 -63.875,28.925 -63.875,25.8 ; -106.933,21.067 -106.5,20.634 -106.5,19.268 ; -71.64,30.06 -68.043,26.462 -68.043,25.8 ; -71.64,30.06 -68.3,33.4 ; -68.043,25.8 -63.875,25.8
  Bottom Layer w0.254: v1(-113.643,30.659) -113.643,30.606 -113.563,30.526 -113.563,29.568 IC7.8@-113.54,29.545 ; IC7.1@-112.54,25.145 -112.54,23.61 C42.2@-112.296,23.366 -112.5,23.162 v1(-112.5,22.5) ; v1(-107.268,22.097) -107.316,22.049 -107.316,21.377 C16.2@-107.155,21.217 -107.13,21.217 -106.647,21.7 -106.647,22.238 -106.901,22.492 IC1.4@-106.901,23.613 ; v1(-105.503,17.55) -105.437,17.55 -105.137,17.85 R27.1@-102.5,17.85 ; v1(-101.449,30.161) -100.736,30.161 C48.2@-100.587,30.31 -100.562,30.31 -100.004,30.868 IC2.8@-98.808,30.868 ; R40.2@-100.645,21.608 R12.2@-100.645,20.678 -100.032,20.678 v1(-99.943,20.588) ; R42.2@-100.645,25.35 R13.2@-100.645,24.419 -100.482,24.256 -100.08,24.256 -99.951,24.128 v1(-99.885,24.128)
  Bottom Layer w0.3: IC6.4@-69.485,25.868 -69.157,25.868 -66.011,25.868 -65.143,25 R25.2@-65.093,25
  Bottom Layer w0.5: C9.2@-73.9,26 IC6.4@-69.617,26 ; IC6.4@-69.485,26.168 -68.881,26.168 -68.043,25.329 v2(-68.043,24.073)
  Bottom Layer w0.8: IC6.2@-69.485,20.068 IC6.4@-69.485,25.868
P5V0_HV: C27.2 C30.2 D17.1 IC6.3 IC12.5 J1.4 L1.1 LD1.2 R32.1 R39.2 R41.2 R65.2 R73.1 | length 109.2
  Top Layer w0.254: v1(-89,23.5) -88.586,23.086 LD1.2@-87.511,23.086
  Top Layer w0.5: R65.2@-56.201,15.408 -56.137,15.343 -56.137,14.4 -55.799,14.062 -53.868,14.062 v1(-53.84,14.089) -53.594,14.336 -53.555,14.336 -53.297,14.594 -53.297,14.633 -52.679,15.251 -52.612,15.251 C27.2@-52.612,15.276 ; IC12.5@-52.687,16.878 -52.647,16.839 C27.2@-52.647,15.526
  Layer 1 w0.254: v1(-89,23.5) -87.1,23.5 -85.883,22.283 -85.817,22.283 ; -85.795,17 -85.795,17.116 ; -85.795,17.5 -85.765,17.53
  Layer 1 w0.5: v1@-86.117,18.983 -86.117,18.836 -85.817,18.537
  Layer 1 w0.6: -85.817,18.199 -85.817,18.773 -85.817,22.283 -80.6,27.5 J1.4@-79.25,27.5 ; -85.795,17 -85.795,14.642 v1(-85.65,14.497) ; -85.795,17.116 -85.795,17.5 -85.795,18.177
  Bottom Layer w0.254: R32.1@-93.2,34 -93.2,33.95 -94.65,32.5 -95.5,32.5 -96,32 -96,27 -95.5,26.5 -93.628,26.5 -93.61,26.518 -90.5,26.518 -89.981,26 R39.2@-89.981,24.305 ; R41.2@-90.902,24.305 R39.2@-89.981,24.305 ; v1(-89,23.5) -89,24 -89.305,24.305 R39.2@-89.981,24.305 ; v1(-86.122,18.988) R73.1@-86.122,19.664
  Bottom Layer w0.5: D17.1@-107.5,13.4 -105.7,13.4 -105,14.1 -86,14.1 -85.65,14.45 v1(-85.65,14.497) -85.594,14.44 v1@-85.66,14.44 ; v1@-85.565,14.411 -81.489,18.486 -77.214,18.486 -76.5,19.2 C30.2@-74.1,19.2 -73.879,19.421 IC6.3@-71.785,19.421 ; IC6.3@-71.785,20.068 -71.785,19.509 -70.176,17.9 -55.9,17.9 -53.84,15.84 v1(-53.84,14.089)
P5V0_IN: C6.2 IC5.1 P1.31 | length 14.6
  Bottom Layer w1: IC5.1@-84.95,1 -85.2,1.25 C6.2@-85.2,3.25 -85.001,3.449 -80.651,3.449 -77.53,6.57 P1.31@-77.53,9.77
P18V2: C19.2 C29.2 IC8.4 IC10.5 R61.2 | length 23.9
  Top Layer w0.3: C19.2@-59.52,19.63 -59.478,19.671 IC10.5@-59.478,20.975 ; C19.2@-59.411,19.251 -58.654,19.251 v1(-58.536,19.132) ; IC8.4@-51.688,30.613 -49.897,30.613 C29.2@-49.861,30.65 -49.861,30.675 -49.122,31.414 v1(-49.097,31.414)
  Layer 2 w0.3: v1(-58.536,19.132) -58.536,20.164 -53.8,24.9 -53.8,27.3 -49.686,31.414 v1(-49.097,31.414)
  Bottom Layer w0.3: R61.2@-59.631,20.77 -59.631,20.69 -58.536,19.595 v1(-58.536,19.132)
P36V0: C20.2 C25.2 C28.2 D7.1 D8.1 D9.1 IC10.1 IC11.14 R64.2 | length 36.1
  Top Layer w0.3: IC10.1@-59.478,23.565 C20.2@-59.478,24.948 ; C25.2@-56.279,23.737 -56.279,23.762 -55.954,24.087 -55.874,24.087 -55.805,24.156 C28.2@-53.508,24.156 ; R64.2@-56.254,22.237 C25.2@-56.254,23.561 ; v2@-41.614,29.365 IC11.14@-39.615,29.365
  Top Layer w0.4: C20.2@-59.64,25.11 -57.99,25.11 -57.3,25.8 -55.789,25.8 -54.146,24.156 C28.2@-53.508,24.156
  Top Layer w0.8: C28.2@-53.508,24.156 -52.733,24.156 -51.894,24.995 v2(-51.086,24.995) ; C28.2@-52.54,23.981 -51.237,22.678 D8.1@-51.137,22.678
  Layer 2 w0.5: v2(-51.086,24.995) -46.948,24.995 -46.289,24.337 -44.263,24.337 -42.5,26.1 -42.5,28.495 v2(-41.622,29.373)
  Bottom Layer w0.5: v2(-41.622,29.373) -41.434,29.561 -41.345,29.561 -41.284,29.5 -40.25,29.5 D7.1@-40,29.25
  Bottom Layer w0.8: D9.1@-51.522,23.578 -51.086,24.014 v2(-51.086,24.995)
SCK: IC11.2 PCBM1.29 | length 68.4
  Top Layer w0.2: PCBM1.29@-103.205,35.873 -102.019,34.687 v1(-102.019,34.674) ; IC11.2@-45.515,28.715 -45.51,28.72 -44.427,28.72 v1(-44.421,28.726)
  Bottom Layer w0.2: v1(-102.019,34.674) -99.53,37.163 -65.763,37.163 -64.4,35.8 -60.8,35.8 -60.5,36.1 -58.284,36.1 -57.836,36.1 -46.4,36.1 -44.421,34.121 v1(-44.421,28.726) v1@-44.445,28.75
SCL1: R39.1 T8.3 U1.2 | length 12
  Bottom Layer w0.254: T8.3@-99.187,21.37 -94.53,21.37 -93.66,20.5 U1.2@-92.715,20.5 -90.673,20.5 -89.981,21.191 R39.1@-89.981,23.365
SDA1: D6.3 R41.1 T9.3 U1.3 | length 13.3
  Bottom Layer w0.254: T9.3@-99.187,24.926 -92.591,24.926 -92.102,24.437 -91.193,23.528 -91.065,23.528 R41.1@-90.902,23.365 -90.902,22.838 -90.693,22.628 -90.693,21.338 -91.023,21.008 -91.476,21.008 ; U1.3@-92.715,21 -91.484,21 -91.476,21.008 ; -91.537,21.008 -91.476,21.008
SDI: IC11.4 PCBM1.23 | length 60.7
  Top Layer w0.2: PCBM1.23@-95.784,36.418 -95.784,35.284 -95.5,35 -91.216,35 v1(-90.162,36.054) ; IC11.4@-45.515,27.415 -45.509,27.408 -44.361,27.408 v1(-44.354,27.402) v1@-44.342,27.415
  Bottom Layer w0.2: v1(-90.162,36.054) -90.138,36.079 -87.671,36.079 -87.039,36.711 -76.1,36.711 -71.211,36.711 -69.724,35.224 -61.024,35.224 -59.7,33.9 -47,33.9 -46.525,33.425 -46.525,32.105 -45.7,31.281 -45.7,28.748 v1(-44.354,27.402)
SDO: IC11.5 PCBM1.26 | length 66.8
  Top Layer w0.2: v1(-100.35,34.58) -100.35,34.611 -99.594,35.367 PCBM1.26@-99.594,36.418 ; IC11.5@-45.515,26.765 v1(-44.081,26.765)
  Bottom Layer w0.2: v1(-100.35,34.58) -98.46,36.47 -92.47,36.47 -91.25,35.25 -86.75,35.25 -86.25,35.75 -80.232,35.75 -79.722,36.26 -78.778,36.26 -78.384,35.866 -76.783,35.866 -76.167,35.25 -70.345,35.25 -67.967,32.872 -48.772,32.872 -46.4,30.5 -46.4,28.265 -44.9,26.765 v1(-44.081,26.765)
U0RXD: PCBM1.34 R5.2 | length 29.1
  Top Layer w0.254: PCBM1.34@-109.629,35.918 -109.629,34.129 -108.5,33 -106.284,33 -101.284,28 v1(-94.5,28) ; v1(-86.032,27.108) -85.975,27.166 -85.487,27.166 R5.2@-85.319,27.333
  Layer 2 w0.2: v1(-94.5,28) -89,28 -88.12,27.12 v1@-86.032,27.12
U0TXD: PCBM1.35 R33.2 | length 30.5
  Top Layer w0.254: PCBM1.35@-110.899,35.918 -110.899,33.899 -109,32 -106.147,32 -101.382,27.235 v1(-93.637,27.235) ; v1(-85.986,26.339) -85.966,26.359 R33.2@-85.519,26.359
  Layer 2 w0.2: v1(-93.637,27.235) -89.735,27.235 -88.839,26.339 v1(-85.986,26.339)
VUART_CTS: J1.5
VUART_DTR: J1.1 R34.1 T10.4 | length 17
  Top Layer w0.254: v1(-82.4,29.7) -82.4,28.6 -79.927,26.127 -78.767,26.127 -78.083,25.443 -78.083,25.383 -78,25.3 -78,21.13 J1.1@-79.25,19.88 ; v1(-82.167,31.916) -82.118,31.964 R34.1@-82.118,32.553 -82.118,33.608 T10.4@-82.045,33.681
  Layer 2 w0.254: v1(-82.4,29.7) -82.4,31.53 -82.435,31.565 -82.435,31.647 v1(-82.167,31.916)
VUART_RTS: J1.7 R35.1 T10.1 | length 7.6
  Top Layer w0.254: T10.1@-84.234,34.981 -84.234,35.752 -83.819,36.167 R35.1@-83.819,36.187 ; R35.1@-83.816,36.19 -83.816,36.957 -83.668,37.106 -81.106,37.106 J1.7@-79.185,35.185
VUART_Rx: J1.2 R33.1 | length 7.6
  Top Layer w0.254: R33.1@-84.579,26.359 -82.109,26.359 -80.75,25 -80.75,23.92 J1.2@-79.25,22.42
VUART_Tx: J1.3 R5.1 | length 6.3
  Top Layer w0.254: R5.1@-84.579,27.333 v1@-83.794,27.333
  Layer 2 w0.254: v1(-83.794,27.404) -83.218,27.404 -80.774,24.96 J1.3@-79.25,24.96
wiper: D7.2 IC4.4 IC11.12 R3.1 | length 17.6
  Top Layer w0.4: v2(-41.439,28.045) -41.429,28.055 -39.625,28.055 IC11.12@-39.615,28.065
  Top Layer w0.5: v1(-40.191,17.067) -39.857,17.067 IC4.4@-39.312,17.612
  Bottom Layer w0.5: v2(-41.439,28.045) -41.439,26.666 -40.773,26 -40.25,26 D7.2@-40,25.75 -40.375,25.75 -40.625,25.5 -40.625,25.487 -42.174,23.938 -42.174,19.934 -40.254,18.013 R3.1@-39.683,18.013 ; v1(-40.191,17.067) -40.191,17.611 -39.989,17.813 R3.1@-39.581,17.813
pads on no net: D6.1 IC2.2 IC2.6 IC4.3 IC4.5 IC7.2 IC10.3 IC11.8 IC11.13 P1.5 P1.6 P1.7 P1.9 P1.10 P1.11 P1.13 P1.14 P1.17 P1.18 P1.20 P1.21 P1.27 P1.28 P1.29 P1.30 PCBM1.4 PCBM1.5 PCBM1.14 PCBM1.17 PCBM1.18 PCBM1.19 PCBM1.20 PCBM1.21 PCBM1.22 PCBM1.27 PCBM1.28 PCBM1.32 U1.5 U2.5

## Polygon pours and split planes (outlines as drawn)
GND_HV on Layer 1 "GND_HV_L02_P001" (solid, remove dead copper, pour order 1): -123.9,0.317 -123.9,37.7 -38.1,37.7 -38.1,26.1 -45.1,19.1 -72,19.1 -79.6,11.5 -99,11.5 -100.1,10.4 -110.212,0.288

## Keep-outs
Top Layer:
  lines w0.254: -85.179,7.988 cw(c-77.38,9.77) -69.477,11.011
Layer 1:
  lines w0.254: -84.893,7.021 cw(c-77.38,9.77) -69.488,11.077
Layer 2:
  lines w0.254: -84.893,7.021 cw(c-77.38,9.77) -69.488,11.077
Bottom Layer:
  lines w0.1: -24.687,13.813 -23.5,15 -23.475,15 -23.475,23 -20.25,23 -20.25,25 -11.75,25 -11.75,21.5 -8.25,21.5 -8.25,24.5 -1.25,24.5 ; -1.5,18 -1.5,33
  lines w0.254: -85.207,8.115 cw(c-77.38,9.77) -69.482,11.043
Keep-Out Layer:
  lines w0.2: -116,16.2 -116,38 0,38 0,0.2
  lines w0.6: -124.5,2.3 -124.5,15.6 -116.6,15.6 -116,16.2

## Other copper
Top Layer:
  rectangle net P5V0_HV: -52.405,16.328 -50.8,17.427
  rectangle net NetD8_2: -52.501,18.931 -50.809,20.025
Bottom Layer:
  rectangle net GND_HV: -108.767,25.031 -101.5,27.008

## Silkscreen, mask and mechanical layers (free items; w line width, h text height)
Top Overlay:
  drawing of 29 lines, arcs and shapes, not listed
  text "DebugLED" at -63.324,37.054 h0.7
  text "RTS" at -76.899,34.239 h0.7 r90
  text "GND" at -76.899,31.471 h0.7 r90
  text "CTS" at -76.899,28.703 h0.7 r90
  text "GND" at -37.55,27.65 h0.7
  text "VCC" at -76.899,25.935 h0.7 r90
  text "Tx" at -76.899,23.867 h0.7 r90
  text "P5V0" at -87.05,23.75 h0.7 r90
  text "P3V3" at -64.25,22.35 h0.7 r90
  text "Rx" at -76.899,21.799 h0.7 r90
  text "HIGH" at -73.9,19.1 h0.7
  text "DTR" at -76.899,19.031 h0.7 r90
  text "VOLTAGE" at -74,18.1 h0.7
  text "HV / CHANNEL" at -66,17.4 h0.7
  text "GND" at -104.901,16.718 h0.7
  text "P5V0" at -108.704,16.613 h0.7
  text "v1.1 2025" at -65.564,16.335 h0.7
  text "WUT ISE" at -65.564,15.035 h0.7
Mechanical 1:
  lines w0.6: -124.5,0 -124.5,15.6 -117.1,15.6 ccw(c-117.1,16.7) -116,16.7 -116,36.4 -116,38 0,38 0,0 -124.5,0

## Text inside footprints (layer, text, board x,y; h text height)
P1: Top Overlay "32" at -83.8,6 h1.02